# Altium PCB Pin Expander 595.PcbDoc
Units mm, origin at the board's own origin, x right, y up, seen from the top; angles counter-clockwise.
Board outline 152.4 x 101.6 mm, 2 copper layers (Top Layer, Bottom Layer); 10 components, 11 nets, 84 pads, 21 vias.
Unrouted connection lines stored in the file: 20.
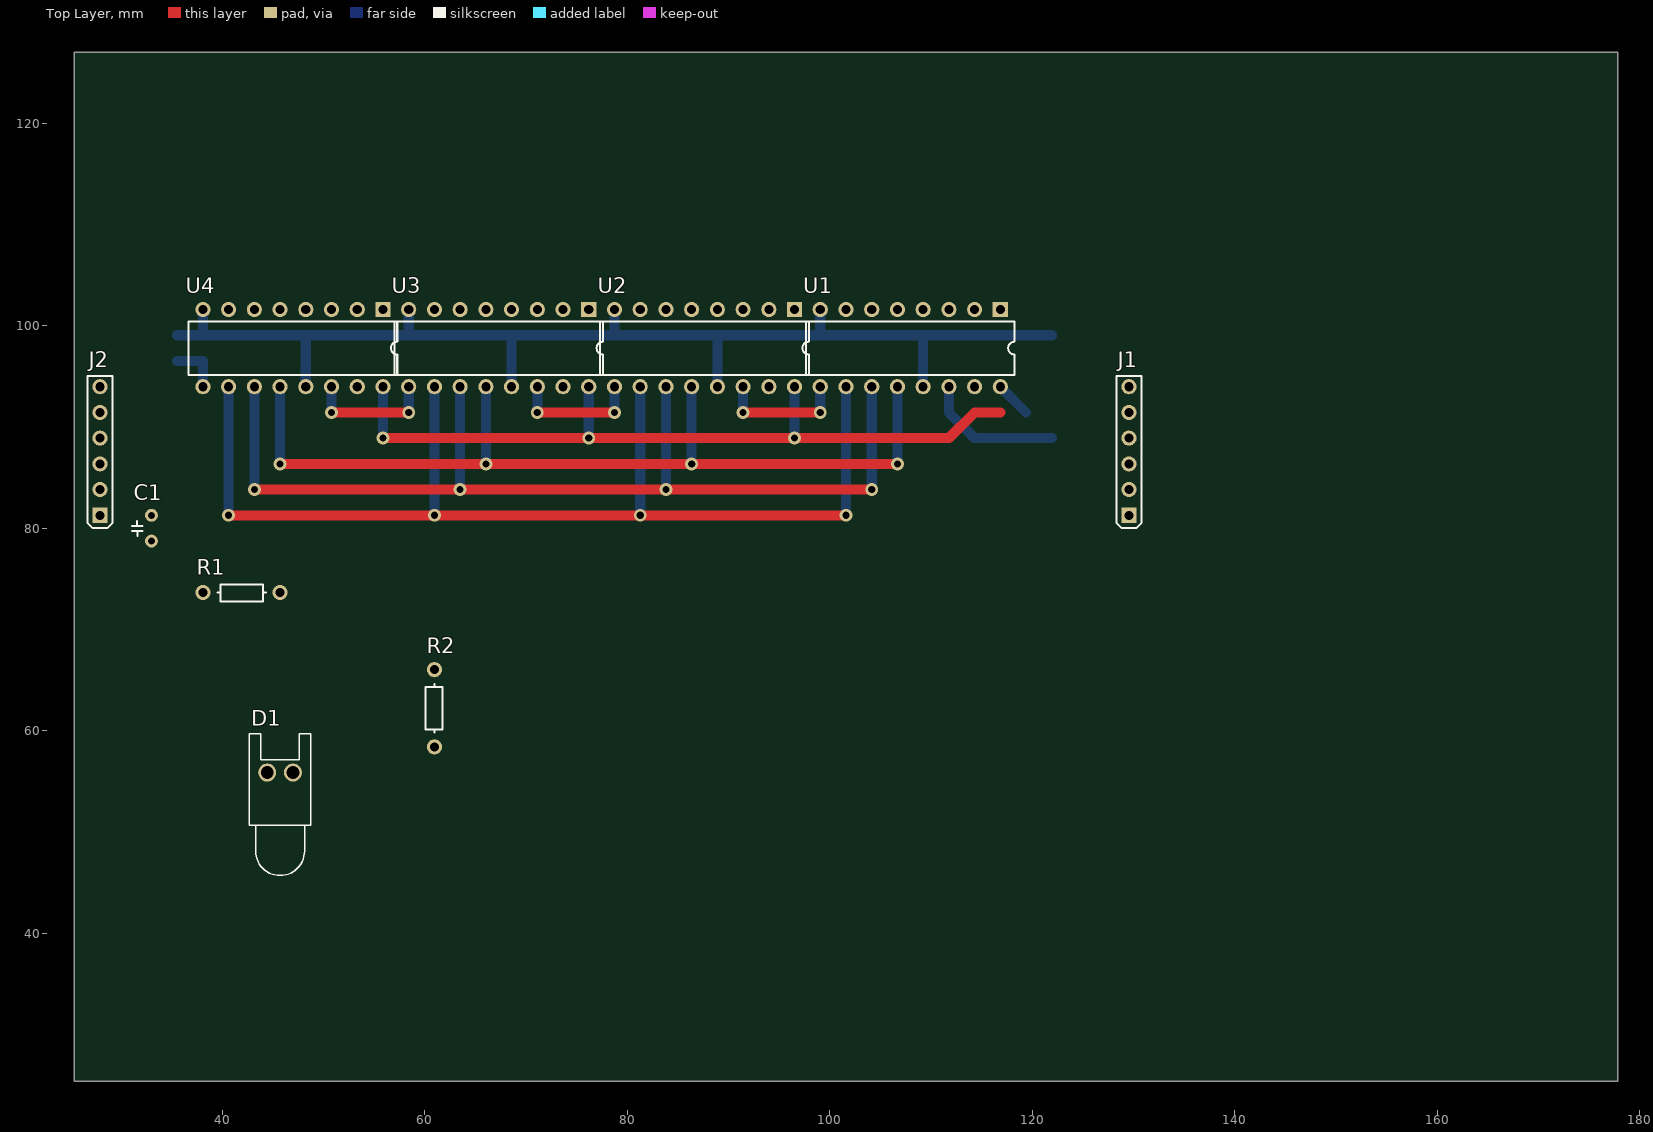
[diagram p0: Top Layer view]
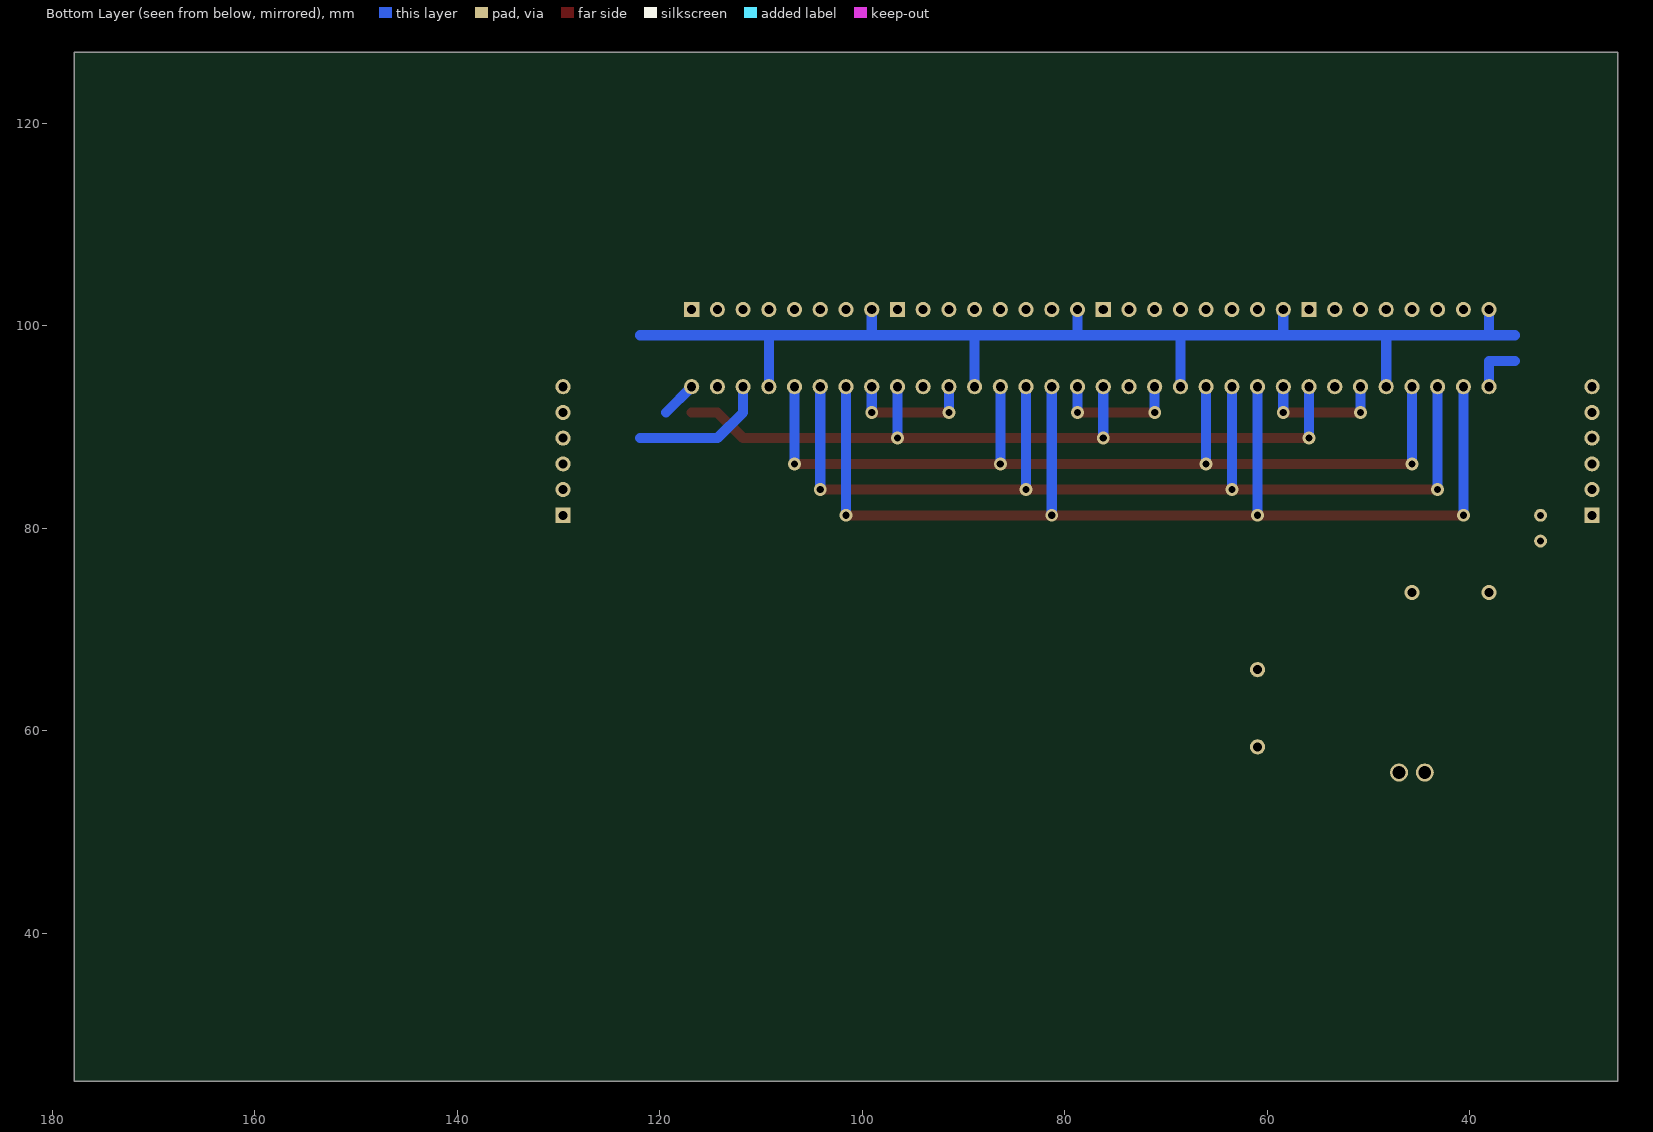
[diagram p1: Bottom Layer view, seen from below]
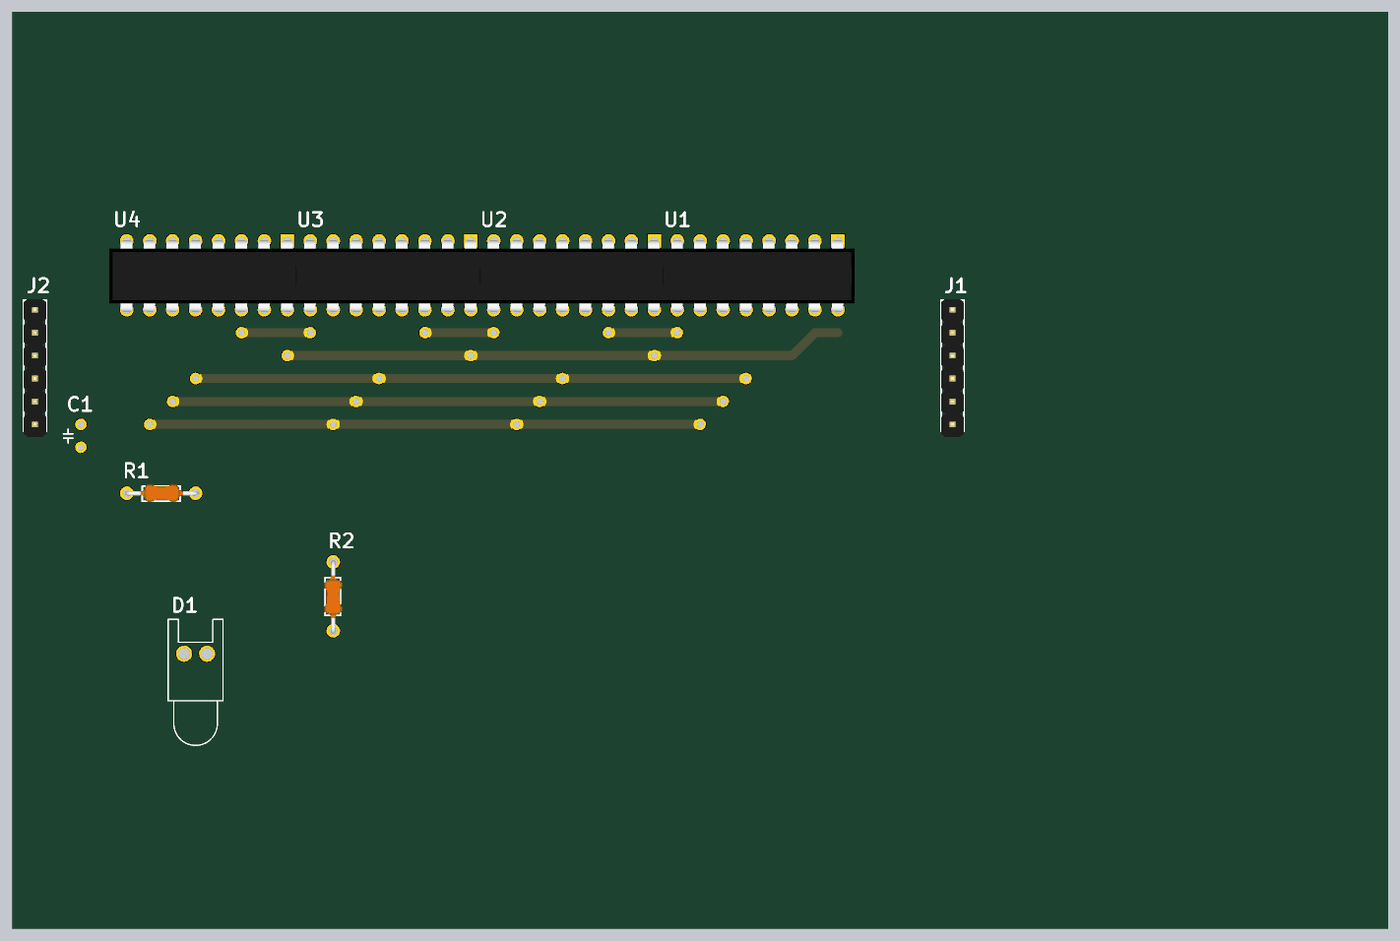
[diagram p2: 3D render of the assembled board from above, using the file's embedded part models]

## Layer stack, top to bottom
Top Solder: solder mask 0.0102, Solder Resist, Dk 3.5
Top Layer: signal copper 0.0356
Dielectric 1: dielectric 0.32, FR-4, Dk 4.8
Bottom Layer: signal copper 0.0356
Bottom Solder: solder mask 0.0102, Solder Resist, Dk 3.5

## Board outline
25.4,25.4 177.8,25.4 177.8,127 25.4,127

## Design rules (kind name [scope] priority, off if disabled: settings)
Clearance [All] p1: gap=0.254
ComponentClearance [All] p1 off: gap=0.254 collisioncheckmode=3 verticalgap=0.254 showdistances=FALSE
PolygonConnect [All] p1: connectstyle=Relief reliefconductorwidth=0.254 reliefentries=4 polygonreliefangle="90 Angle" airgapwidth=0.254
RoutingVias [All] p1: holewidth=0.711 width=1.27 viastyle="Through Hole" minholewidth=0.711 minwidth=1.27 maxholewidth=0.711 maxwidth=1.27
SolderMaskExpansion [All] p1: expansion=0.102
Width [All] p1: maxlimit=1.5 minlimit=1 preferedwidth=1 minimp=50.000000 maximp=50.000000 favimp=50.000000
28 further rules are at their usual default settings.

## Components (designator, comment, footprint, x,y, rotation, side; value= is the part's Value field where it differs from the comment)
C1 "10mF" "Cap p2.54mm (2p)" 33.02,78.74 r90 top
D1 "LED0" LED-0 45.72,55.88 r0 top
J1 "connector" "Line 2.54 x 6" 129.54,81.28 r180 top
J2 "connector" "Line 2.54 x 6" 27.94,81.28 r180 top
R1 "10 КOm" "Res p7.62 (4p)" 45.72,73.66 r180 top
R2 "220 Om" "Res p7.62 (4p)" 60.96,58.42 r90 top
U1 "SN74HC595N" DIP16 116.84,101.6 r180 top
U2 "SN74HC595N" DIP16 96.52,101.6 r180 top
U3 "SN74HC595N" DIP16 76.2,101.6 r180 top
U4 "SN74HC595N" DIP16 55.88,101.6 r180 top

## Footprints (in the part's own frame and the unit in brackets; to place one, negate y for a bottom-side part, rotate by r counter-clockwise, add the part's x,y. Pads: shape width x height; smd on the part's side, far side on the other; paste and mask are expansions set on the pad)
"Cap p2.54mm (2p)" [mm]
  round 1.27 hole 0.7: 1(0,0) 2(2.54,0)
  silkscreen extent 0.5,0.9 1.99,1.92
DIP16 [mm] "DIP; 16 Leads; Row Spacing 7.62 mm; Pitch 2.54 mm"
  rect 1.5x1.5 hole 0.9: 1(0,0)
  round 1.5 hole 0.9: 2(2.54,0) 3(5.08,0) 4(7.62,0) 5(10.16,0) 6(12.7,0) 7(15.24,0) 8(17.78,0) 9(17.78,7.62) 10(15.24,7.62) 11(12.7,7.62) 12(10.16,7.62) 13(7.62,7.62) 14(5.08,7.62) 15(2.54,7.62) 16(0,7.62)
  silkscreen extent -1.41,1.16 19.19,6.46, body extent -1.87,-0.05 19.72,7.83, height 4.19
LED-0 [mil] "LED; 2 Leads"
  round 70 hole 50: 1(50,0) 2(-50,0)
  silkscreen extent -120,-400 120,150
"Line 2.54 x 6" [mm]
  rect 1.5x1.5 hole 0.9: 1(0,0)
  round 1.5 hole 0.9: 2(0,-2.54) 3(0,-5.08) 4(0,-7.62) 5(0,-10.16) 6(0,-12.7)
  silkscreen extent -1.25,-13.77 1.25,1.28, body extent -1.25,-13.86 1.25,1.38, height 8.2
"Res p7.62 (4p)" [mm] "L p7.62; horisontal"
  round 1.5 hole 0.9: 1(0,0) 2(7.62,0)
  silkscreen extent 1.4,-0.8 6.2,0.9, body extent -0.3,-1 7.8,1, height 2.1

## Part data
C1: library part Cap, "Capacitor"
D1: "Typical INFRARED GaAs LED"
J1 J2: library part "Connector ( 6 pin )", "6pin Connector"
R1 R2: library part Resistor
U1 U2 U3 U4: "8-Bit Shift Register with 3-State Output Registers"

## Via types
v1: diameter 1.27, hole 0.711, Top Layer to Bottom Layer, 21 vias

## Nets (pads, with @x,y where several pads share a name; then routed paths per layer and width w, separated by ;. In a path a pad name is that pad's centre, name@x,y a point inside that pad or via, vN(x,y) a via of type N, cw(c..) or ccw(c..) an arc to the next point about the centre after c; other vN are vias at no path point)
CLK: J1.2 J2.2 U1.11 U2.11 U3.11 U4.11 | length 101.6
  Top Layer w1: v1(43.18,83.82) v1(63.5,83.82) v1(83.82,83.82) v1(104.14,83.82)
  Bottom Layer w1: v1(43.18,83.82) U4.11 ; v1(63.5,83.82) U3.11 ; v1(83.82,83.82) U2.11 ; v1(104.14,83.82) U1.11
DATA: J1.4 U1.14 | length 13.8
  Bottom Layer w1: U1.14 111.76,91.44 114.3,88.9 121.92,88.9
"DATA OUT": J2.4 U4.9 | length 5.1
  Bottom Layer w1: 35.56,96.52 38.1,96.52 U4.9
GND: C1.1 J1.6 J2.6 R2.2 U1.8 U1.13 U2.8 U2.13 U3.8 U3.13 U4.8 U4.13 | length 116.8
  Bottom Layer w1: 35.56,99.06 38.1,99.06 ; U4.8 38.1,99.06 ; U4.13 48.26,99.06 ; U3.8 58.42,99.06 ; U3.13 68.58,99.06 ; U2.8 78.74,99.06 ; U2.13 88.9,99.06 ; U1.8 99.06,99.06 ; U1.13 109.22,99.06 ; 121.92,99.06 109.22,99.06 ; 38.1,99.06 48.26,99.06 ; 48.26,99.06 58.42,99.06 ; 58.42,99.06 68.58,99.06 ; 68.58,99.06 78.74,99.06 ; 78.74,99.06 88.9,99.06 ; 88.9,99.06 99.06,99.06 ; 99.06,99.06 109.22,99.06
LATCH: J1.3 J2.3 U1.12 U2.12 U3.12 U4.12 | length 91.4
  Top Layer w1: v1(45.72,86.36) v1(66.04,86.36) v1(86.36,86.36) v1(106.68,86.36)
  Bottom Layer w1: v1(45.72,86.36) U4.12 ; v1(66.04,86.36) U3.12 ; v1(86.36,86.36) U2.12 ; v1(106.68,86.36) U1.12
MR: C1.2 J1.1 J2.1 R1.2 U1.10 U2.10 U3.10 U4.10 | length 111.8
  Top Layer w1: v1(40.64,81.28) v1(60.96,81.28) v1(81.28,81.28) v1(101.6,81.28)
  Bottom Layer w1: v1(40.64,81.28) U4.10 ; v1(60.96,81.28) U3.10 ; v1(81.28,81.28) U2.10 ; v1(101.6,81.28) U1.10
NetD1_2: D1.2 R2.1
NetU1_9: U1.9 U2.14 | length 12.7
  Top Layer w1: v1(91.44,91.44) v1(99.06,91.44)
  Bottom Layer w1: v1(91.44,91.44) U2.14 ; v1(99.06,91.44) U1.9
NetU2_9: U2.9 U3.14 | length 12.7
  Top Layer w1: v1(71.12,91.44) v1(78.74,91.44)
  Bottom Layer w1: v1(71.12,91.44) U3.14 ; v1(78.74,91.44) U2.9
NetU3_9: U3.9 U4.14 | length 12.7
  Top Layer w1: v1(50.8,91.44) v1(58.42,91.44)
  Bottom Layer w1: v1(50.8,91.44) U4.14 ; v1(58.42,91.44) U3.9
VCC: D1.1 J1.5 J2.5 R1.1 U1.16 U2.16 U3.16 U4.16 | length 80.8
  Top Layer w1: v1(55.88,88.9) v1(76.2,88.9) v1(96.52,88.9) 111.76,88.9 114.3,91.44 116.84,91.44
  Bottom Layer w1: v1(55.88,88.9) U4.16 ; v1(76.2,88.9) U3.16 ; v1(96.52,88.9) U2.16 ; U1.16 119.38,91.44
pads on no net: U1.1 U1.2 U1.3 U1.4 U1.5 U1.6 U1.7 U1.15 U2.1 U2.2 U2.3 U2.4 U2.5 U2.6 U2.7 U2.15 U3.1 U3.2 U3.3 U3.4 U3.5 U3.6 U3.7 U3.15 U4.1 U4.2 U4.3 U4.4 U4.5 U4.6 U4.7 U4.15